# EAGLE board LogicBoard-Pico (EAGLE 9.6.2)
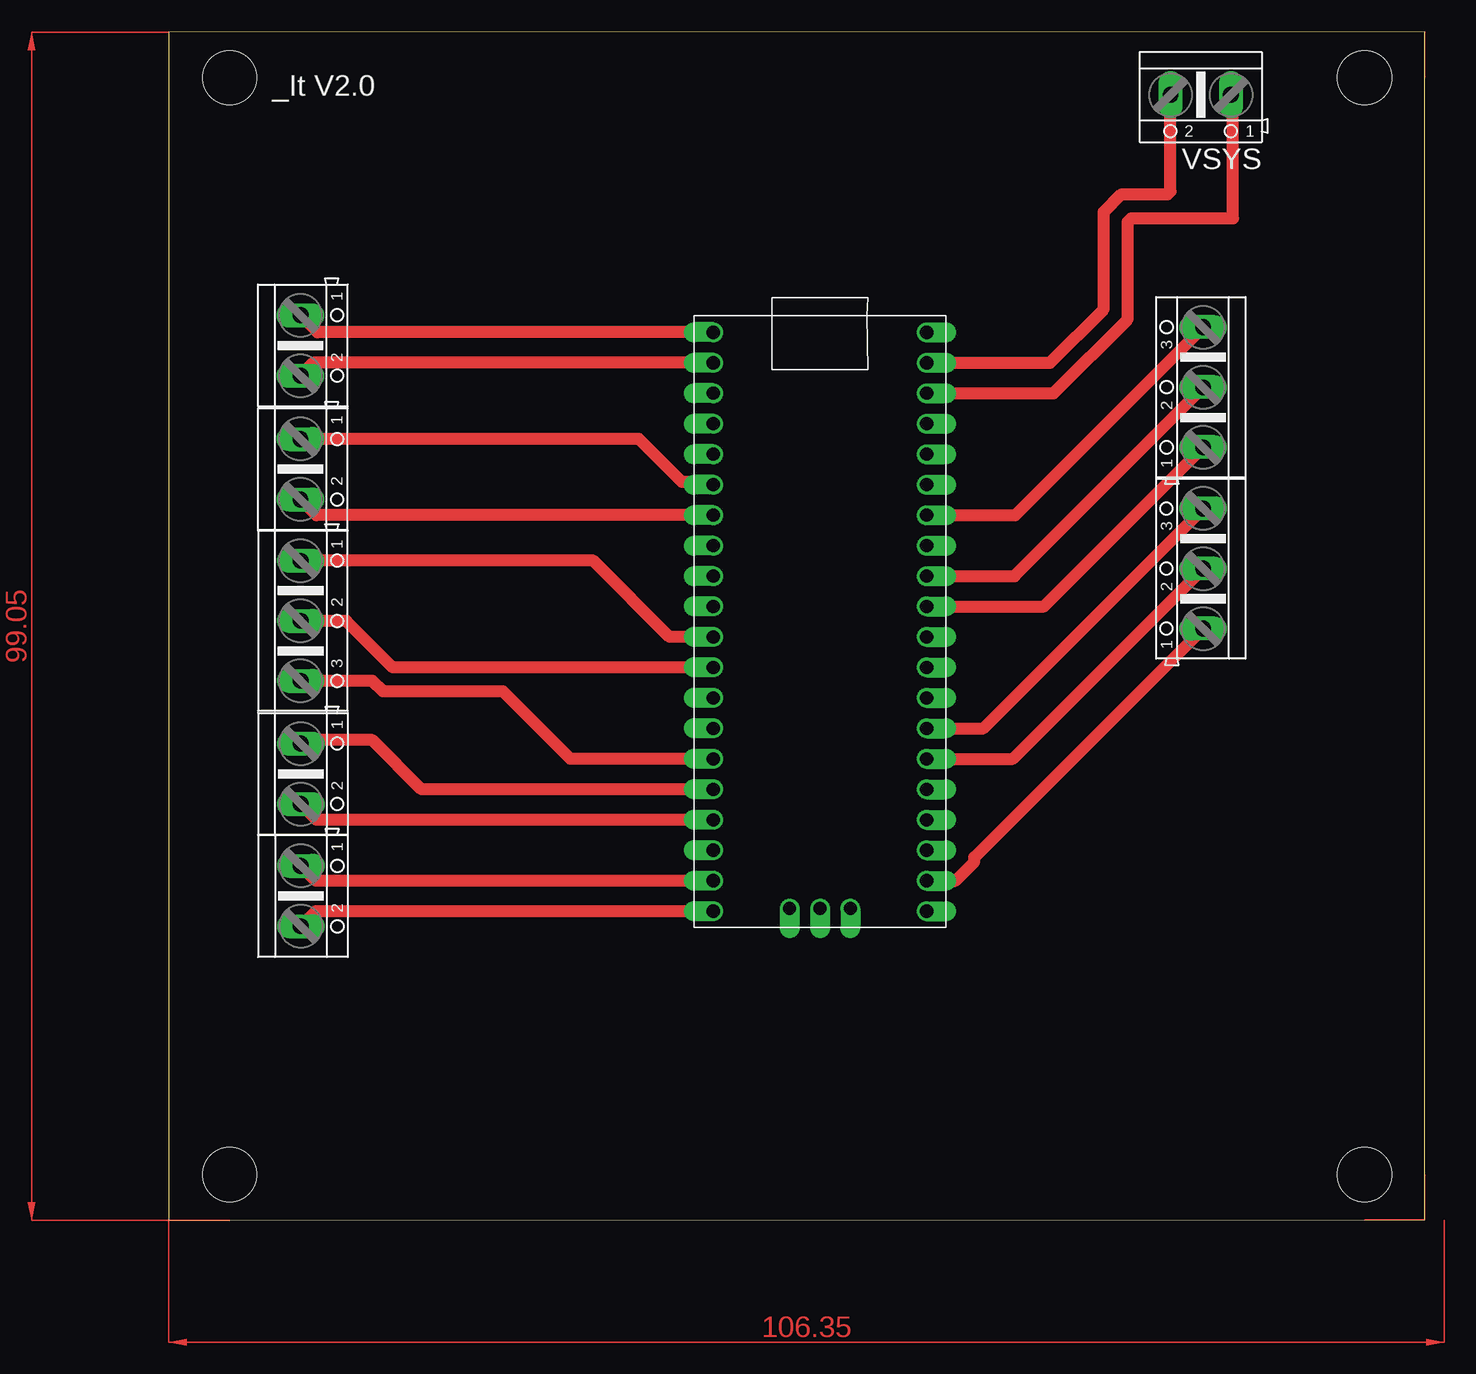
[diagram p0: board, top side]

Size 104.7 x 99.1 mm. Coordinates in mm from the lower left corner, seen from the top.
Outline: 0,0 104.7,0.05 104.7,99.1 0,99.05 0,0
Copper layers (1*16): Top 0.035mm / dielectric 1.5mm / Bottom 0.035mm
Design rules "default *": minimum track width 1mm, minimum drill 0.35mm, track to track 1mm, track to pad 1mm, pad to pad 6mil, via to via 6mil, smd to smd 6mil, copper to edge 40mil, drill to drill 6mil, minimum pad ring 10mil, minimum via ring 8mil, stop-mask expansion 4mil, vias tented up to drill 0mil, thermal gap 10mil
Holes 4.5 mm at 5.08,3.81 5.08,95.25 99.69,95.25 99.69,3.81

## Footprints (pad centres in the part's own frame; a part is rotated, then mirrored left to right if it is on the bottom)
AK500/3 = drill 1.321 long: 1 -5.004,0; 2 0,0; 3 5.004,0
AK500/2 = drill 1.321 long: 1 -2.515,0; 2 2.515,0
RPI_PICO_TH = drill 1.1 pad 1.6 offset: 3V3 8.89,13.97; 3V3_EN 8.89,16.51; ADC_VREF 8.89,11.43; AGND 8.89,6.35; GND@1 -8.89,19.05; GND@2 -8.89,6.35; GND@3 -8.89,-6.35; GND@4 -8.89,-19.05; GND@5 0,-23.9; GND@6 8.89,-19.05; GND@7 8.89,-6.35; GND@8 8.89,19.05; GP0 -8.89,24.13; GP1 -8.89,21.59; GP2 -8.89,16.51; GP3 -8.89,13.97; GP4 -8.89,11.43; GP5 -8.89,8.89; GP6 -8.89,3.81; GP7 -8.89,1.27; GP8 -8.89,-1.27; GP9 -8.89,-3.81; GP10 -8.89,-8.89; GP11 -8.89,-11.43; GP12 -8.89,-13.97; GP13 -8.89,-16.51; GP14 -8.89,-21.59; GP15 -8.89,-24.13; GP16 8.89,-24.13; GP17 8.89,-21.59; GP18 8.89,-16.51; GP19 8.89,-13.97; GP20 8.89,-11.43; GP21 8.89,-8.89; GP22 8.89,-3.81; GP26_A0 8.89,1.27; GP27_A1 8.89,3.81; GP28_A2 8.89,8.89; RUN 8.89,-1.27; SWCLK -2.54,-23.9; SWDIO 2.54,-23.9; VBUS 8.89,24.13; VSYS 8.89,21.59

## Placement (x,y rotation side)
ADC  [AK500/3]  86.24,69.44 90 top
I2C0  [AK500/2]  10.99,62.61 270 top
I2C1  [AK500/3]  86.23,54.33 90 top
PICO  [RPI_PICO_TH]  54.3,49.9 0 top
PWM_M1  [AK500/2]  11.02,27.03 270 top
PWM_M2  [AK500/2]  11.01,37.22 270 top
PWM_SERVO  [AK500/3]  11,49.98 270 top
UART0  [AK500/2]  10.99,72.93 270 top
VSYS  [AK500/2]  86.03,93.83 180 top

## Library data of the parts
ADC I2C0 I2C1 PWM_M1 PWM_M2 PWM_SERVO UART0 VSYS = con-ptr500; OC_FARNELL: unknown; OC_NEWARK: unknown
PICO = RaspberryPi_Pico

## Nets
N$1: PICO.GND@8 VSYS.1
N$2: PICO.VSYS VSYS.2
N$3: ADC.3 PICO.GP28_A2
N$4: ADC.2 PICO.GP27_A1
N$5: ADC.1 PICO.GP26_A0
N$6: I2C1.3 PICO.GP21
N$7: I2C1.2 PICO.GP20
N$8: PICO.GP0 UART0.1
N$9: PICO.GP1 UART0.2
N$10: I2C0.1 PICO.GP4
N$11: I2C0.2 PICO.GP5
N$12: PICO.GP15 PWM_M1.2
N$13: PICO.GP14 PWM_M1.1
N$14: PICO.GP13 PWM_M2.2
N$15: PICO.GP12 PWM_M2.1
N$16: PICO.GP11 PWM_SERVO.3
N$17: PICO.GP9 PWM_SERVO.2
N$18: PICO.GP8 PWM_SERVO.1
N$19: I2C1.1 PICO.GP17

## Tracks (layer width: path | path; a pad name or v marks a point on that pad's centre or on a via)
N$1
  Top 1: PICO.GND@8 73.76,68.95 79.95,75.13 79.95,83.23 80.25,83.53 88.72,83.53 88.72,93.66 VSYS.1
N$2
  Top 1: PICO.VSYS 73.47,71.49 77.95,75.96 77.95,84.06 79.42,85.53 83.28,85.53 83.52,85.78 VSYS.2
N$3
  Top 1: PICO.GP28_A2 70.58,58.79 ADC.3
N$4
  Top 1: PICO.GP27_A1 70.5,53.71 ADC.2
N$5
  Top 1: PICO.GP26_A0 72.97,51.17 ADC.1
N$6
  Top 1: PICO.GP21 67.91,41.01 I2C1.3
N$7
  Top 1: PICO.GP20 70.37,38.47 I2C1.2
N$8
  Top 1: PICO.GP0 12.41,74.03 UART0.1
N$9
  Top 1: PICO.GP1 12.06,71.49 UART0.2
N$10
  Top 1: PICO.GP4 45.19,61.54 42.79,61.54 39.21,65.13 I2C0.1
N$11
  Top 1: PICO.GP5 12.29,58.79 I2C0.2
N$12
  Top 1: PICO.GP15 12.27,25.77 PWM_M1.2
N$13
  Top 1: PICO.GP14 12.25,28.31 PWM_M1.1
N$14
  Top 1: PICO.GP13 12.33,33.39 PWM_M2.2
N$15  (1 unrouted)
  Top 1: PICO.GP12 21.1,35.93 16.99,40.03 10.57,40.03
N$16
  Top 1: PICO.GP11 33.49,38.47 27.87,44.09 17.86,44.09 16.97,44.97 PWM_SERVO.3
N$17
  Top 1: PICO.GP9 18.69,46.09 14.8,49.98 PWM_SERVO.2
N$18
  Top 1: PICO.GP8 41.76,48.63 35.4,54.98 PWM_SERVO.1
N$19
  Top 1: I2C1.1 67.16,30.25 67.16,29.88 65.58,28.31 PICO.GP17
(copper drawn outside any net)
  shapes: Top area x7

## Text on the board
tPlace: _It V2.0